# EAGLE board Bodacious Jaagub-Uusam (EAGLE 9.7.0)

Size 168.66 x 155.52 mm. Coordinates in mm from the lower left corner, seen from the top.
Outline: 0,0 168.66,0 168.66,155.52 0,155.52 0,0
Copper layers (1*16): Top 0.035mm / dielectric 1.5mm / Bottom 0.035mm
Design rules "default": minimum track width 6mil, minimum drill 0.35mm, track to track 6mil, track to pad 6mil, pad to pad 6mil, via to via 6mil, smd to smd 6mil, copper to edge 40mil, drill to drill 6mil, minimum pad ring 10mil, minimum via ring 8mil, stop-mask expansion 4mil, vias tented up to drill 0mil, thermal gap 10mil

## Footprints (pad centres in the part's own frame; a part is rotated, then mirrored left to right if it is on the bottom)
BATTERY-GENERIC = drill 1.118 pad 3.15 octagon: + 2.54,0; - -2.54,0
RESAD1016W63L850D250B = drill 0.83 pad 1.43: 1 -5.08,0; 2 5.08,0
ARDUINO-UNO-R3-SHIELD = drill 1.016 pad 1.88: 3.3V 24.13,-2.54; 5V 24.13,0; A0 24.13,12.7; A1 24.13,15.24; A2 24.13,17.78; A3 24.13,20.32; A4 24.13,22.86; A5 24.13,25.4; AREF -24.13,-13.97; D2 -24.13,20.32; D3 -24.13,17.78; D4 -24.13,15.24; D5 -24.13,12.7; D6 -24.13,10.16; D7 -24.13,7.62; D8 -24.13,3.81; D9 -24.13,1.27; D10 -24.13,-1.27; D11 -24.13,-3.81; D12 -24.13,-6.35; D13 -24.13,-8.89; GND@0 24.13,2.54; GND@1 24.13,5.08; GND@2 -24.13,-11.43; IOREF 24.13,-7.62; NC 24.13,-10.16; RES 24.13,-5.08; RX -24.13,25.4; SCL -24.13,-19.05; SDA -24.13,-16.51; TX -24.13,22.86; VIN 24.13,7.62

## Placement (x,y rotation side)
FUNC1  FUNCTION-GENERATOR  [BATTERY-GENERIC]  122.14,8.26 180 top
R1  2.2k  [RESAD1016W63L850D250B]  162.33,44.52 90 top
R2  2.2k  [RESAD1016W63L850D250B]  162.33,64.84 90 top
R3  2.2k  [RESAD1016W63L850D250B]  101.37,49.6 0 top
UAD  ARDUINO-UNO-R3-SHIELD  [ARDUINO-UNO-R3-SHIELD]  48.98,66.23 270 top
UDA  ARDUINO-UNO-R3-SHIELD  [ARDUINO-UNO-R3-SHIELD]  47.88,125.67 270 top

## Library data of the parts
FUNC1 R1-R3 UAD UDA = Tinkercad

## Nets
FUNC1+: FUNC1.+ R1.1
FUNC1-: FUNC1.- UAD.GND@0 UAD.GND@1 UAD.GND@2
UAD_5V: R2.2 UAD.5V
UAD_A0: R1.2 R2.1 UAD.A0
UAD_D2: UAD.D2 UDA.D2
UAD_D3: UAD.D3 UDA.D3
UAD_D4: UAD.D4 UDA.D4
UAD_D6: UAD.D6 UDA.D6
UDA_D7: UAD.D7 UDA.D7

## Tracks (layer width: path | path; a pad name or v marks a point on that pad's centre or on a via)
FUNC1+  (1 unrouted)
FUNC1-  (3 unrouted)
UAD_5V  (1 unrouted)
UAD_A0  (2 unrouted)
UAD_D2  (1 unrouted)
UAD_D3  (1 unrouted)
UAD_D4  (1 unrouted)
UAD_D6  (1 unrouted)
UDA_D7  (1 unrouted)